# EAGLE board ttl (EAGLE 5.01)
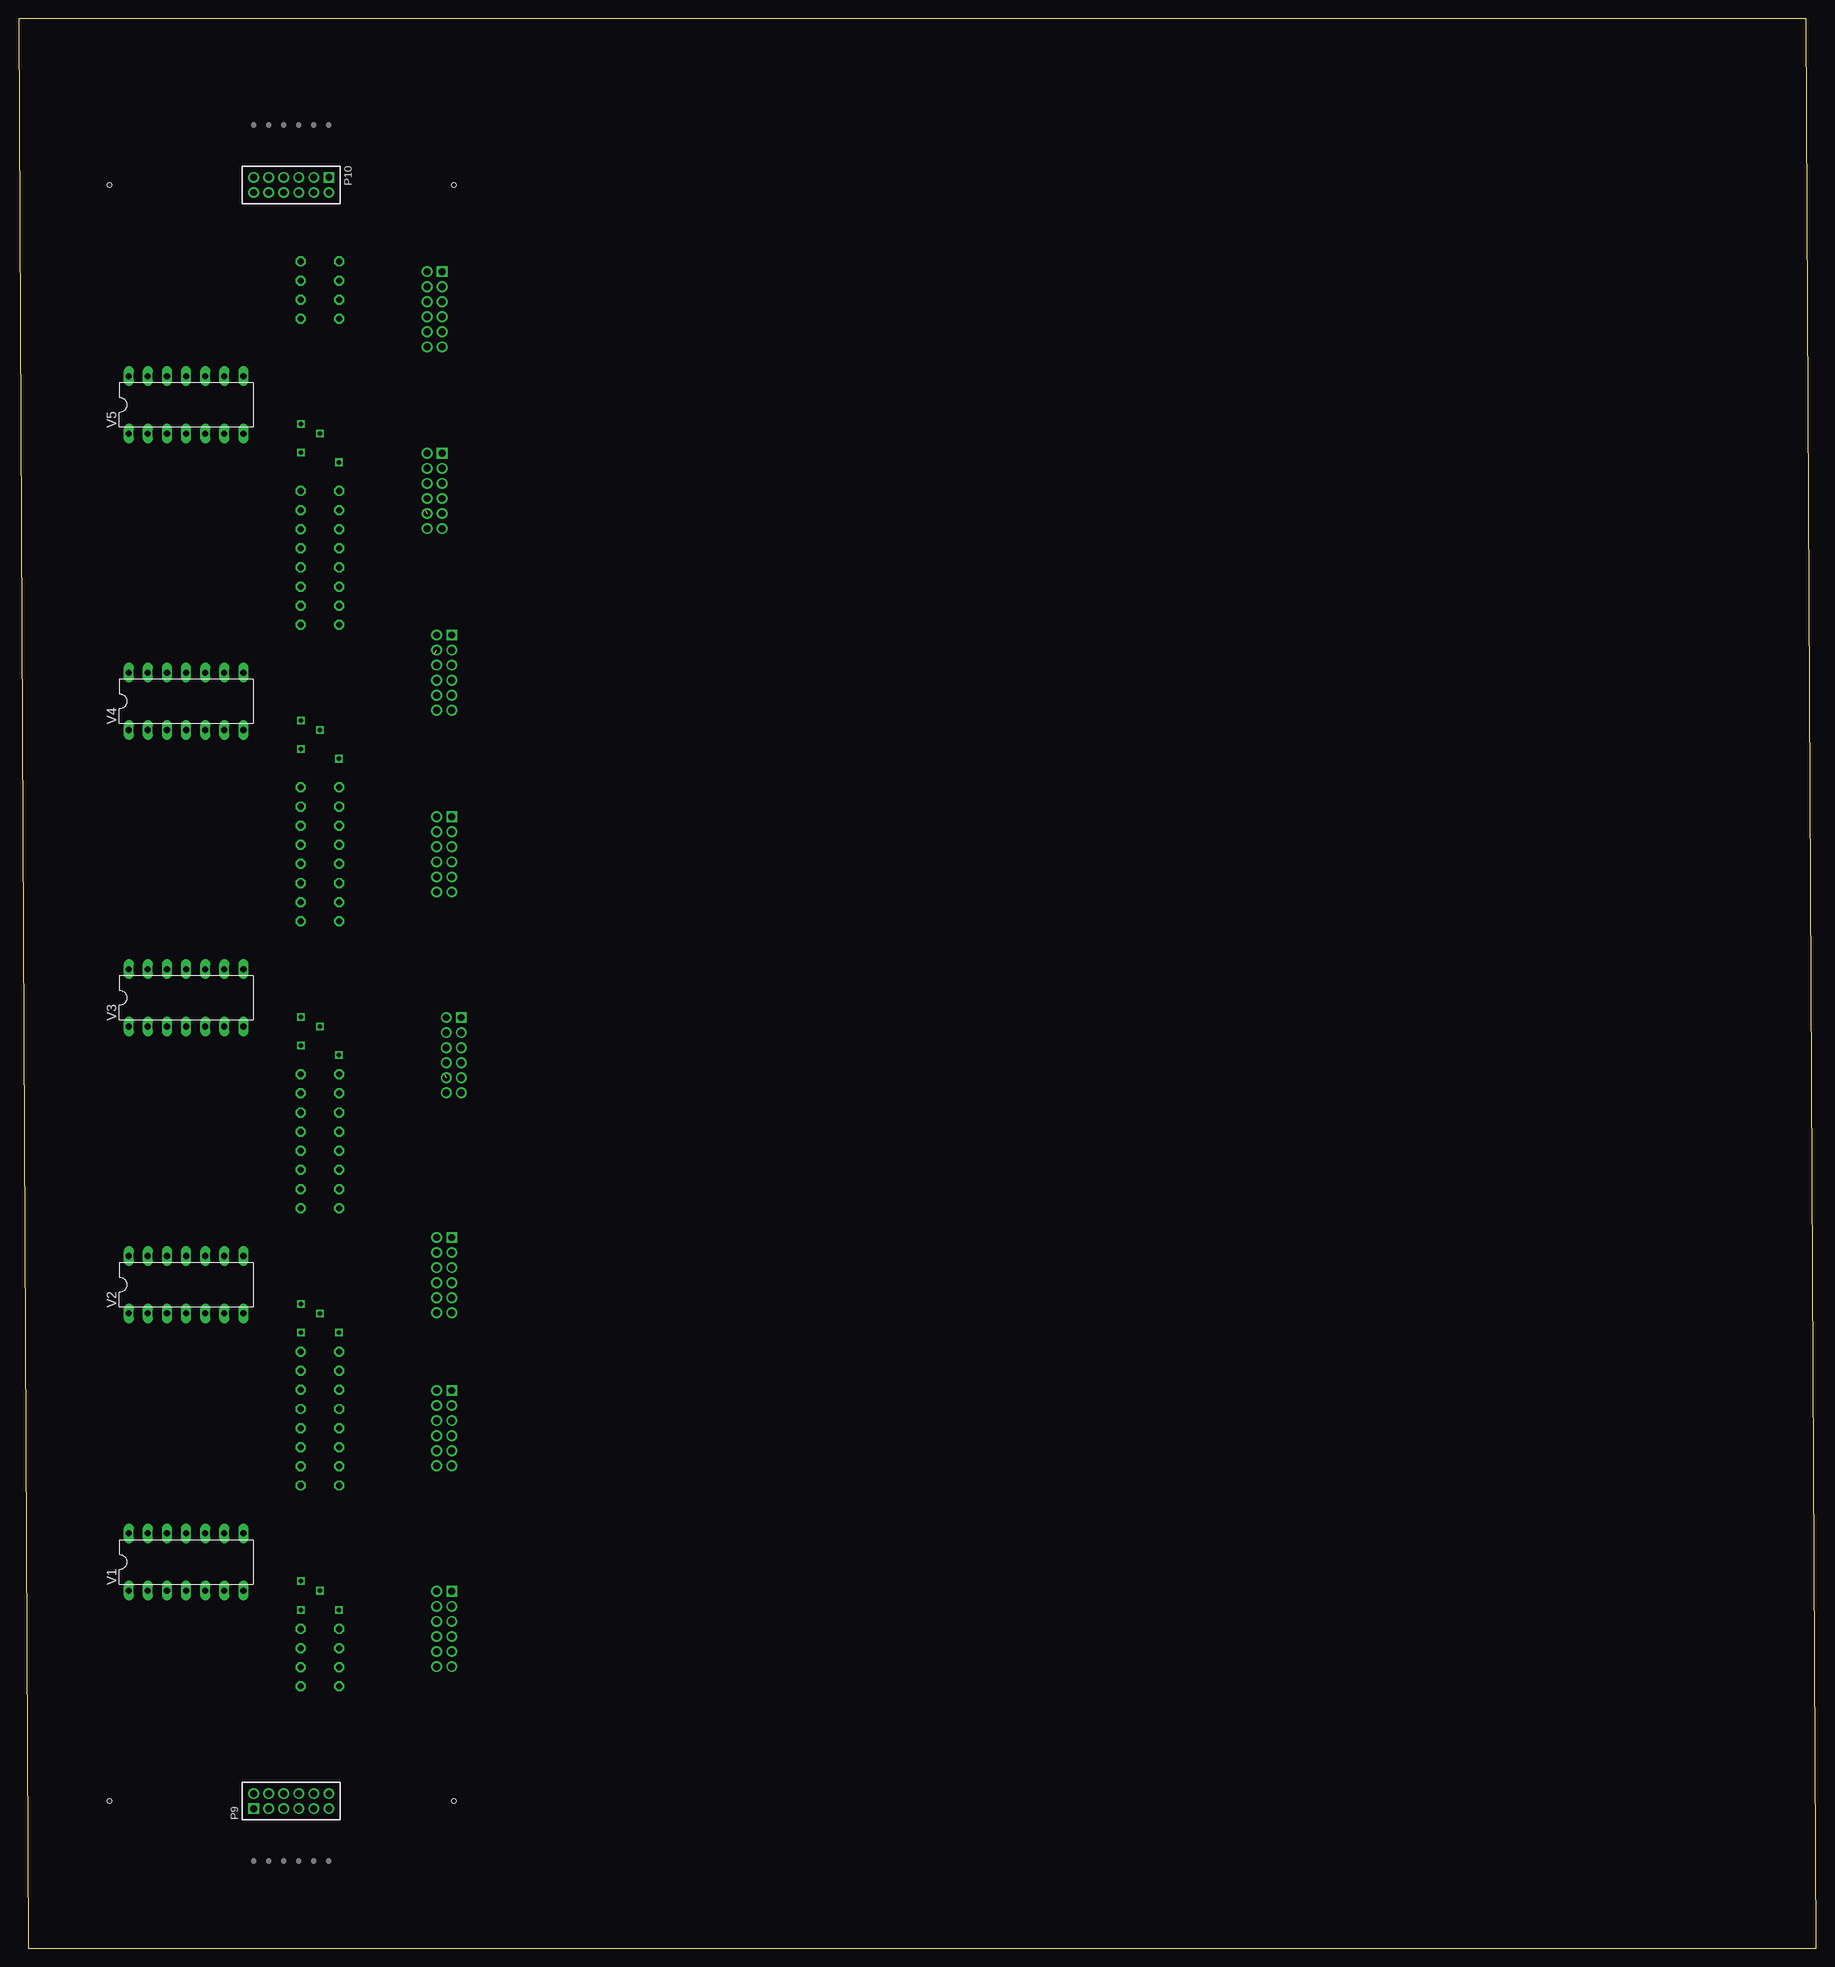
[diagram p0: board, top side]
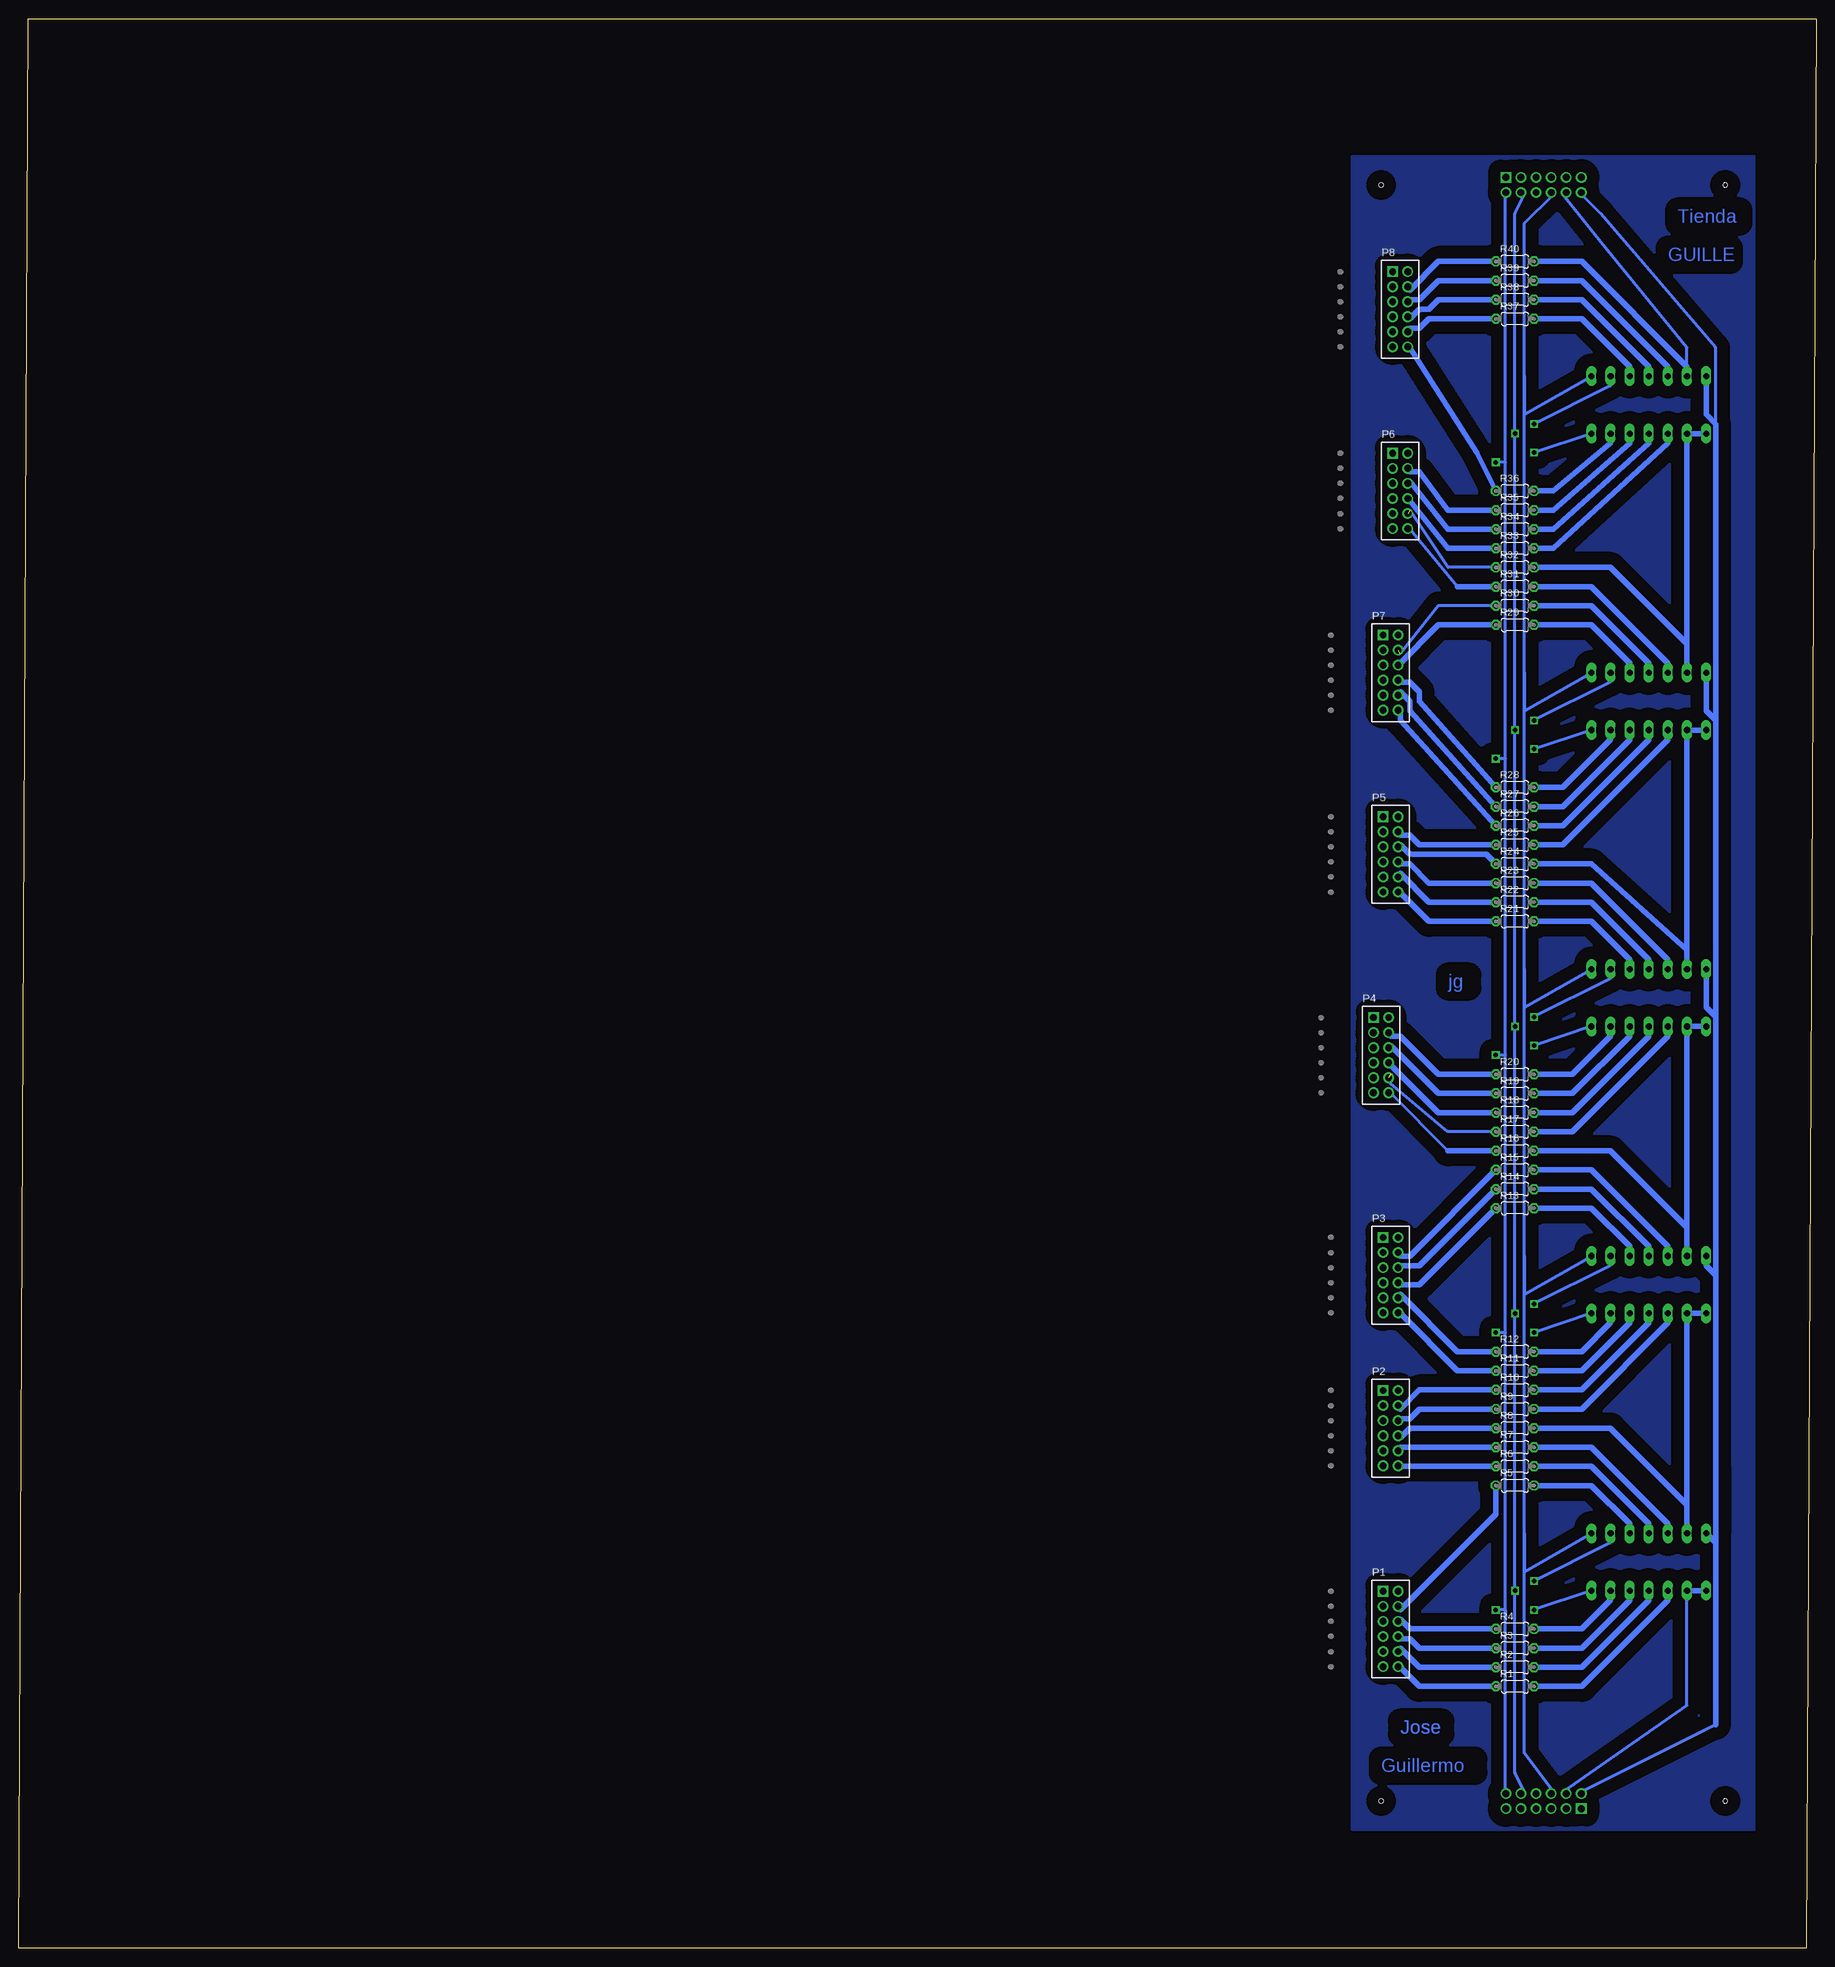
[diagram p1: board, bottom side, seen from below]

Size 238.74 x 256.21 mm. Coordinates in mm from the lower left corner, seen from the top.
Outline: 1.27,0 238.74,0 237.47,256.21 0,256.21 1.27,0
Copper layers (1*16): Top 0.035mm / dielectric 1.5mm / Bottom 0.035mm
Design rules "default *": minimum track width 30mil, minimum drill 24mil, track to track 8mil, track to pad 8mil, pad to pad 8mil, via to via 8mil, smd to smd 8mil, copper to edge 40mil, drill to drill 8mil, minimum pad ring 10mil, minimum via ring 8mil, stop-mask expansion 4mil, vias tented up to drill 0mil, thermal gap 10mil
Holes 0.6 mm at 12.06,19.52 57.78,19.52 57.78,234.15 12.06,234.15

## Footprints (pad centres in the part's own frame; a part is rotated, then mirrored left to right if it is on the bottom)
87760-12 = drill 0.914 square: 1 -5,-1 | drill 0.914 round: 2 -5,1; 3 -3,-1; 4 -3,1; 5 -1,-1; 6 -1,1; 7 1,-1; 8 1,1; 9 3,-1; 10 3,1; 11 5,-1; 12 5,1
0204/5 = drill 0.813 octagon: 1 -2.54,0; 2 2.54,0
DIL14 = drill 0.813 long: 1 -7.62,-3.81; 2 -5.08,-3.81; 3 -2.54,-3.81; 4 0,-3.81; 5 2.54,-3.81; 6 5.08,-3.81; 7 7.62,-3.81; 8 7.62,3.81; 9 5.08,3.81; 10 2.54,3.81; 11 0,3.81; 12 -2.54,3.81; 13 -5.08,3.81; 14 -7.62,3.81

## Placement (x,y rotation side)
P1  87760-12  [87760-12]  56.51,42.38 270 bottom
P2  87760-12  [87760-12]  56.51,69.05 270 bottom
P3  87760-12  [87760-12]  56.51,89.37 270 bottom
P4  87760-12  [87760-12]  57.78,118.58 270 bottom
P5  87760-12  [87760-12]  56.51,145.25 270 bottom
P6  87760-12  [87760-12]  55.24,193.51 270 bottom
P7  87760-12  [87760-12]  56.51,169.38 270 bottom
P8  87760-12  [87760-12]  55.24,217.64 270 bottom
P9  87760-12  [87760-12]  36.19,19.52 0 top
P10  87760-12  [87760-12]  36.19,234.15 180 top
R1  [0204/5]  40,34.76 0 bottom
R2  [0204/5]  40,37.3 0 bottom
R3  [0204/5]  40,39.84 0 bottom
R4  [0204/5]  40,42.38 0 bottom
R5  [0204/5]  40,61.43 0 bottom
R6  [0204/5]  40,63.97 0 bottom
R7  [0204/5]  40,66.51 0 bottom
R8  [0204/5]  40,69.05 0 bottom
R9  [0204/5]  40,71.59 0 bottom
R10  [0204/5]  40,74.13 0 bottom
R11  [0204/5]  40,76.67 0 bottom
R12  [0204/5]  40,79.21 0 bottom
R13  [0204/5]  40,98.26 0 bottom
R14  [0204/5]  40,100.8 0 bottom
R15  [0204/5]  40,103.34 0 bottom
R16  [0204/5]  40,105.88 0 bottom
R17  [0204/5]  40,108.42 0 bottom
R18  [0204/5]  40,110.96 0 bottom
R19  [0204/5]  40,113.5 0 bottom
R20  [0204/5]  40,116.04 0 bottom
R21  [0204/5]  40,136.36 0 bottom
R22  [0204/5]  40,138.9 0 bottom
R23  [0204/5]  40,141.44 0 bottom
R24  [0204/5]  40,143.98 0 bottom
R25  [0204/5]  40,146.52 0 bottom
R26  [0204/5]  40,149.06 0 bottom
R27  [0204/5]  40,151.6 0 bottom
R28  [0204/5]  40,154.14 0 bottom
R29  [0204/5]  40,175.73 0 bottom
R30  [0204/5]  40,178.27 0 bottom
R31  [0204/5]  40,180.81 0 bottom
R32  [0204/5]  40,183.35 0 bottom
R33  [0204/5]  40,185.89 0 bottom
R34  [0204/5]  40,188.43 0 bottom
R35  [0204/5]  40,190.97 0 bottom
R36  [0204/5]  40,193.51 0 bottom
R37  [0204/5]  40,216.37 0 bottom
R38  [0204/5]  40,218.91 0 bottom
R39  [0204/5]  40,221.45 0 bottom
R40  [0204/5]  40,223.99 0 bottom
V1  74164N  [DIL14]  22.22,51.27 0 top
V2  74164N  [DIL14]  22.22,88.1 0 top
V3  74164N  [DIL14]  22.22,126.2 0 top
V4  74164N  [DIL14]  22.22,165.57 0 top
V5  74164N  [DIL14]  22.22,204.94 0 top

## Library data of the parts
P1-P10 = con-molex-milli-grid
R1-R40 = resistor
V1-V5 = 74ttl-din

## Nets
+UB: V2.14 V3.14 V4.14 V5.14
N$1: R1.2 V1.3
N$2: R2.2 V1.4
N$3: R3.2 V1.5
N$4: R4.2 V1.6
N$5: R5.2 V1.10
N$6: R6.2 V1.11
N$7: R7.2 V1.12
N$8: R8.2 V1.13 V2.1 V2.2
N$9: R9.2 V2.3
N$10: R10.2 V2.4
N$11: R11.2 V2.5
N$12: R12.2 V2.6
N$13: R13.2 V2.10
N$14: R14.2 V2.11
N$15: R15.2 V2.12
N$16: R16.2 V2.13 V3.1 V3.2
N$17: R17.2 V3.3
N$18: R18.2 V3.4
N$19: R19.2 V3.5
N$20: R20.2 V3.6
N$21: R21.2 V3.10
N$22: R22.2 V3.11
N$23: R23.2 V3.12
N$24: R24.2 V3.13 V4.1 V4.2
N$25: R25.2 V4.3
N$26: R26.2 V4.4
N$27: R27.2 V4.5
N$28: R28.2 V4.6
N$29: R29.2 V4.10
N$30: R30.2 V4.11
N$31: R31.2 V4.12
N$32: R32.2 V4.13 V5.1 V5.2
N$33: V5.3
N$34: V5.4
N$35: V5.5
N$36: V5.6
N$37: R37.2 V5.10
N$38: R38.2 V5.11
N$39: R39.2 V5.12
N$40: R40.2 V5.13
N$41: P1.12 R1.1
N$42: P1.10 R2.1
N$43: P1.8 R3.1
N$44: P1.6 R4.1
N$45: P1.4 R5.1
N$46: P2.12 R6.1
N$47: P2.10 R7.1
N$48: P2.8 R8.1
N$49: P2.6 R9.1
N$50: P2.4 R10.1
N$51: P3.12 R11.1
N$52: P3.10 R12.1
N$53: P3.8 R13.1
N$54: P3.6 R14.1
N$55: P3.4 R15.1
N$56: R16.1
N$57: P4.10 R17.1
N$58: P4.8 R18.1
N$59: P4.6 R19.1
N$60: P4.4 R20.1
N$61: P5.12 R21.1
N$62: P5.10 R22.1
N$63: P5.8 R23.1
N$64: P5.6 R24.1
N$65: P5.4 R25.1
N$66: P7.12 R26.1
N$67: P7.10 R27.1
N$68: P7.8 R28.1
N$69: P7.6 R29.1
N$70: P7.4 R30.1
N$71: R31.1
N$72: P6.10 R32.1
N$73: P6.8 R33.1
N$74: P6.6 R34.1
N$75: P6.4 R35.1
N$76: P8.12 R36.1
N$77: P8.10 R37.1
N$78: P8.8 R38.1
N$79: P8.6 R39.1
N$80: P8.4 R40.1
S$1: V1.8 V2.8 V3.8 V4.8 V5.8
S$4: V1.1 V1.2
S$7: V5.9
S$8: V2.9
S$10: V3.9
S$13: V4.9
S$14: V1.7
S$15: V1.9

## Tracks (layer width: path | path; a pad name or v marks a point on that pad's centre or on a via)
+UB
  Bottom 0.406: 31.11,232.88 28.57,230.34 13.33,212.56 13.33,202.4
  Bottom 0.762: V5.14 14.6,203.67 13.33,202.4 13.33,163.03 | V4.14 14.6,164.3 13.33,163.03 | V3.14 14.6,124.93 13.33,123.66 | 13.33,123.66 13.33,163.03 | V2.14 14.6,90.64 13.33,89.37 | 13.33,89.37 13.33,123.66 | 13.33,63.97 13.33,55.08 | 13.33,63.97 13.33,89.37 | 13.33,53.81 13.33,63.97 | 13.33,53.81 14.6,55.08 | 13.33,29.68 13.33,53.81
N$1
  Bottom 0.762: R1.2 31.11,34.76 19.68,46.19 V1.3
N$2
  Bottom 0.762: R2.2 31.11,37.3 22.22,46.19 V1.4
N$3
  Bottom 0.762: R3.2 31.11,39.84 24.76,46.19 V1.5
N$4
  Bottom 0.762: R4.2 31.11,42.38 27.3,46.19 V1.6
N$5
  Bottom 0.762: R5.2 29.84,61.43 24.76,56.35 V1.10
N$6
  Bottom 0.762: R6.2 29.84,63.97 22.22,56.35 V1.11
N$7
  Bottom 0.762: R7.2 29.84,66.51 19.68,56.35 V1.12
N$8
  Bottom 0.762: V1.13 17.14,69.05 | 17.14,69.05 V2.2 V2.1 | 17.14,69.05 17.14,58.89 27.3,69.05 R8.2
N$9
  Bottom 0.762: R9.2 31.11,71.59 19.68,83.02 V2.3
N$10
  Bottom 0.762: R10.2 31.11,74.13 22.22,83.02 V2.4
N$11
  Bottom 0.762: R11.2 31.11,76.67 24.76,83.02 V2.5
N$12
  Bottom 0.762: R12.2 31.11,79.21 27.3,83.02 V2.6
N$13
  Bottom 0.762: R13.2 29.84,98.26 24.76,93.18 V2.10
N$14
  Bottom 0.762: R14.2 29.84,100.8 22.22,93.18 V2.11
N$15
  Bottom 0.762: R15.2 29.84,103.34 19.68,93.18 V2.12
N$16
  Bottom 0.762: V2.13 17.14,105.88 | 17.14,105.88 V3.2 V3.1 | 17.14,105.88 17.14,95.72 27.3,105.88 R16.2
N$17
  Bottom 0.762: R17.2 32.38,108.42 19.68,121.12 V3.3
N$18
  Bottom 0.762: R18.2 32.38,110.96 22.22,121.12 V3.4
N$19
  Bottom 0.762: R19.2 32.38,113.5 24.76,121.12 V3.5
N$20
  Bottom 0.762: R20.2 32.38,116.04 27.3,121.12 V3.6
N$21
  Bottom 0.762: R21.2 29.84,136.36 24.76,131.28 V3.10
N$22
  Bottom 0.762: R22.2 29.84,138.9 22.22,131.28 V3.11
N$23
  Bottom 0.762: R23.2 29.84,141.44 19.68,131.28 V3.12
N$24
  Bottom 0.762: V3.13 17.14,143.98 | 17.14,143.98 V4.2 V4.1 | 17.14,143.98 17.14,132.55 29.84,143.98 R24.2
N$25
  Bottom 0.762: R25.2 33.65,146.52 19.68,160.49 V4.3
N$26
  Bottom 0.762: R26.2 33.65,149.06 22.22,160.49 V4.4
N$27
  Bottom 0.762: R27.2 33.65,151.6 24.76,160.49 V4.5
N$28
  Bottom 0.762: R28.2 33.65,154.14 27.3,160.49 V4.6
N$29
  Bottom 0.762: R29.2 29.84,175.73 24.76,170.65 V4.10
N$30
  Bottom 0.762: R30.2 29.84,178.27 22.22,170.65 V4.11
N$31
  Bottom 0.762: R31.2 29.84,180.81 19.68,170.65 V4.12
N$32
  Bottom 0.762: V4.13 17.14,183.35 | 17.14,183.35 V5.2 V5.1 | 17.14,183.35 17.14,173.19 27.3,183.35 R32.2
N$33
  Bottom 0.406: 19.68,199.86 V5.3
  Bottom 0.762: 37.46,185.89 34.92,185.89 19.68,199.86
N$34
  Bottom 0.406: 22.22,199.86 V5.4
  Bottom 0.762: 37.46,188.43 34.92,188.43 22.22,199.86
N$35
  Bottom 0.406: 24.76,199.86 V5.5
  Bottom 0.762: 24.76,199.86 34.92,190.97 37.46,190.97
N$36
  Bottom 0.406: 27.3,199.86 V5.6
  Bottom 0.762: 27.3,199.86 34.92,193.51 37.46,193.51
N$37
  Bottom 0.762: R37.2 31.11,216.37 24.76,210.02 V5.10
N$38
  Bottom 0.762: R38.2 31.11,218.91 22.22,210.02 V5.11
N$39
  Bottom 0.762: R39.2 31.11,221.45 19.68,210.02 V5.12
N$40
  Bottom 0.406: V5.13 17.14,212.56 28.57,226.53 33.65,232.88
  Bottom 0.762: R40.2 31.11,223.99 17.14,210.02 V5.13
N$41
  Bottom 0.762: R1.1 52.7,34.76 55.24,37.3 P1.12
N$42
  Bottom 0.762: R2.1 52.7,37.3 55.24,39.84 P1.10
N$43
  Bottom 0.762: R3.1 52.7,39.84 53.97,41.11 55.24,41.11 P1.8
N$44
  Bottom 0.762: P1.6 55.24,43.65 53.97,42.38 R4.1
N$45
  Bottom 0.762: R5.1 42.54,57.62 55.24,44.92 P1.4
N$46
  Bottom 0.762: R6.1 55.24,63.97 P2.12
N$47
  Bottom 0.762: R7.1 55.24,66.51 P2.10
N$48
  Bottom 0.762: R8.1 53.97,69.05 55.24,67.78 P2.8
N$49
  Bottom 0.762: R9.1 52.7,71.59 53.97,70.32 55.24,70.32 P2.6
N$50
  Bottom 0.762: R10.1 52.7,74.13 55.24,71.59 P2.4
N$51
  Bottom 0.762: R11.1 47.62,76.67 55.24,84.29 P3.12
N$52
  Bottom 0.762: R12.1 47.62,79.21 55.24,86.83 P3.10
N$53
  Bottom 0.762: R13.1 52.7,88.1 55.24,88.1 P3.8
N$54
  Bottom 0.762: R14.1 52.7,90.64 55.24,90.64 P3.6
N$55
  Bottom 0.762: R15.1 53.97,91.91 55.24,91.91 P3.4
N$56
  Bottom 0.406: 48.89,105.88 56.51,113.5
  Bottom 0.762: R16.1 48.89,105.88
N$57  (1 unrouted)
  Bottom 0.406: R17.1 48.89,108.42 56.51,114.77 56.51,116.04
N$58
  Bottom 0.762: R18.1 50.16,110.96 P4.8
N$59
  Bottom 0.762: R19.1 50.16,113.5 56.51,119.85 P4.6
N$60
  Bottom 0.762: R20.1 50.16,116.04 55.24,121.12 56.51,121.12 P4.4
N$61
  Bottom 0.762: R21.1 51.43,136.36 55.24,140.17 P5.12
N$62
  Bottom 0.762: R22.1 51.43,138.9 55.24,142.71 P5.10
N$63
  Bottom 0.762: R23.1 51.43,141.44 53.97,143.98 55.24,143.98 P5.8
N$64
  Bottom 0.762: R24.1 43.81,145.25 53.97,145.25 55.24,146.52 P5.6
N$65
  Bottom 0.762: R25.1 52.7,146.52 53.97,147.79 55.24,147.79 P5.4
N$66
  Bottom 0.762: R26.1 55.24,163.03 55.24,164.3 P7.12
N$67
  Bottom 0.762: R27.1 53.97,164.3 53.97,165.57 55.24,166.84 P7.10
N$68
  Bottom 0.762: R28.1 52.7,165.57 52.7,166.84 53.97,168.11 55.24,168.11 P7.8
N$69
  Bottom 0.762: R29.1 50.16,175.73 P7.6
N$70  (1 unrouted)
  Bottom 0.406: R30.1 50.16,178.27 55.24,171.92
N$71
  Bottom 0.406: 47.62,180.81 53.97,188.43
  Bottom 0.762: R31.1 47.62,180.81
N$72  (1 unrouted)
  Bottom 0.406: 53.97,190.97 48.89,183.35 R32.1
N$73
  Bottom 0.762: R33.1 48.89,185.89 P6.8
N$74
  Bottom 0.762: R34.1 48.89,188.43 53.97,194.78 P6.6
N$75
  Bottom 0.762: R35.1 48.89,190.97 52.7,196.05 53.97,196.05 P6.4
N$76
  Bottom 0.762: R36.1 45.08,198.59 53.97,212.56 P8.12
N$77
  Bottom 0.762: R37.1 51.43,216.37 52.7,215.1 53.97,215.1 P8.10
N$78
  Bottom 0.762: R38.1 50.16,218.91 51.43,217.64 52.7,217.64 53.97,216.37 P8.8
N$79
  Bottom 0.762: R39.1 50.16,221.45 52.7,218.91 53.97,218.91 P8.6
N$80
  Bottom 0.762: R40.1 50.16,223.99 53.97,220.18 P8.4
S$1
  Bottom 0.406: 38.73,169.38 38.73,208.75 | 38.73,130.01 38.73,169.38 | 38.73,91.91 38.73,130.01 | 38.73,55.08 38.73,91.91 | 38.73,55.08 38.73,25.87 34.92,20.79 | V1.8 38.73,50 38.73,55.08 | V2.8 38.73,86.83 38.73,91.91 | V3.8 38.73,124.93 38.73,130.01 | V4.8 38.73,164.3 38.73,169.38 | V5.8 38.73,203.67 38.73,208.75 | 38.73,208.75 38.73,229.07 34.92,232.88
S$2  (via drill 0.6)
  Bottom 0.406: 41.27,81.75 41.27,118.58 | 41.27,118.58 41.27,157.95 | 41.27,157.95 41.27,197.32 | 41.27,197.32 41.27,232.88 | 41.27,44.92 41.27,43.65 | 41.27,20.79 41.27,44.92 | 41.27,44.92 41.27,81.75 | 41.27,157.95 v42.54,157.95 | 41.27,118.58 v42.54,118.58 | 41.27,81.75 v42.54,81.75 | 41.27,44.92 v42.54,44.92 | 41.27,197.32 v42.54,197.32
S$3
  Bottom 0.406: 13.33,29.68 31.11,20.79
S$4
  Bottom 0.406: V1.2 17.14,32.22 33.65,20.79
  Bottom 0.762: V1.2 V1.1
S$5  (via drill 0.6)
  Bottom 0.406: 38.73,20.79 40,23.33 v40,47.46 v40,84.29 v40,122.39 v40,161.76 v40,201.13 40,230.34 38.73,232.88
S$6  (via drill 0.6)
  Bottom 0.406: 29.84,201.13 v37.46,198.59
S$7  (via drill 0.6)
  Bottom 0.406: V5.9 27.3,207.48 v37.46,202.4
S$8  (via drill 0.6)
  Bottom 0.406: V2.9 27.3,90.64 v37.46,85.56
S$9  (via drill 0.6)
  Bottom 0.406: 29.84,84.29 v37.46,81.75
S$10  (via drill 0.6)
  Bottom 0.406: v37.46,123.66 27.3,128.74 V3.9
S$11  (via drill 0.6)
  Bottom 0.406: 29.84,122.39 v37.46,119.85
S$12  (via drill 0.6)
  Bottom 0.406: 29.84,161.76 v37.46,159.22
S$13  (via drill 0.6)
  Bottom 0.406: v37.46,163.03 27.3,168.11 V4.9
S$14  (via drill 0.6)
  Bottom 0.406: V1.7 v37.46,44.92
S$15  (via drill 0.6)
  Bottom 0.406: v37.46,48.73 27.3,53.81 V1.9
S$16
  pour Bottom (isolate 1.676): 8.25,15.71 61.59,15.71 61.59,237.96 8.25,237.96

## Text on the board
Bottom: Tienda | GUILLE | jg | Jose | Jose | Guillermo